# EAGLE board ConnectorPair (EAGLE 6.6.0)
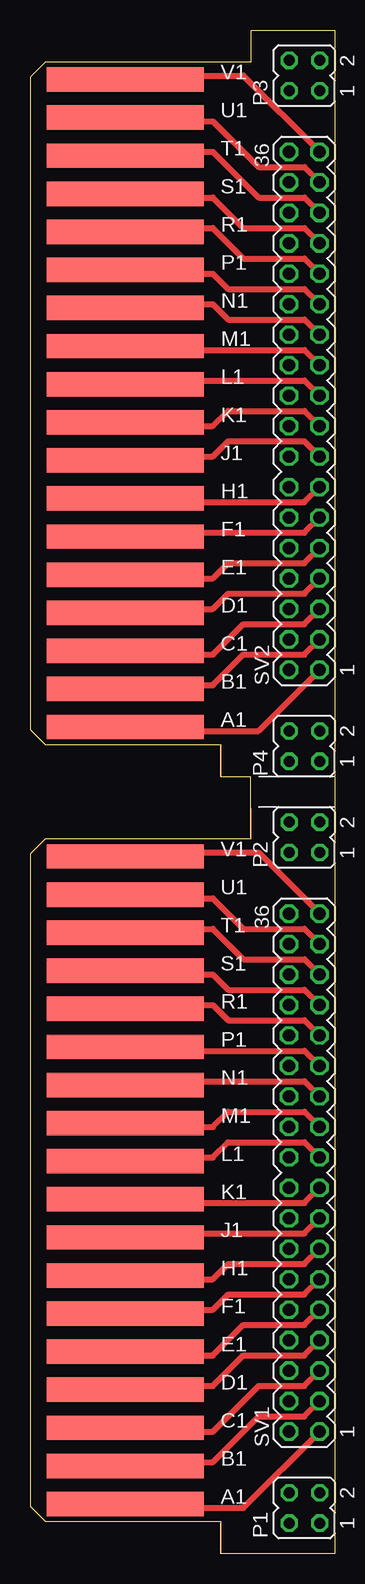
[diagram p0: board, top side]
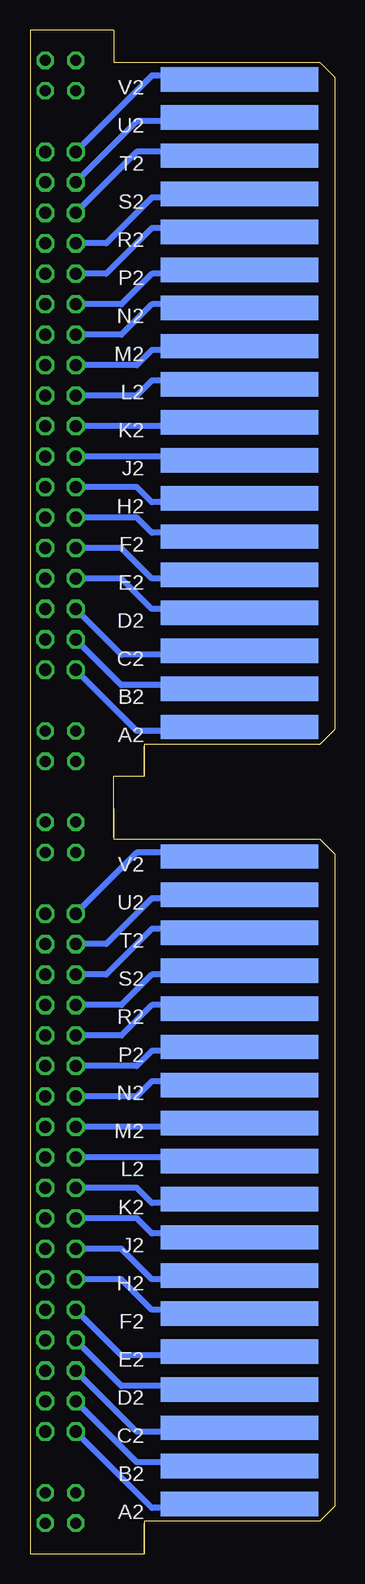
[diagram p1: board, bottom side, seen from below]

Size 25.4 x 127 mm. Coordinates in mm from the lower left corner, seen from the top.
Outline: 18.41,124.46 18.41,127 25.4,127 25.4,0 15.88,0 15.88,2.54
Outline: 15.88,67.31 15.88,64.77 18.41,64.77 18.41,59.69
Copper layers (1+16): Top 0.035mm / dielectric 1.5mm / Bottom 0.035mm
Design rules "16mils": minimum track width 16mil, minimum drill 32mil, track to track 15mil, track to pad 10mil, pad to pad 10mil, via to via 10mil, smd to smd 10mil, copper to edge 13mil, drill to drill 10mil, minimum pad ring 10mil, minimum via ring 8mil, stop-mask expansion 0mil, vias tented up to drill 0mil, thermal gap 10mil
Net classes: 0 default: width 0.508 mm

## Footprints (pad centres in the part's own frame; a part is rotated, then mirrored left to right if it is on the bottom)
JP2Q = drill 0.914 octagon: 1 -1.27,-1.27; 2 -1.27,1.27; 3 1.27,-1.27; 4 1.27,1.27
MA18-2 = drill 1.016 octagon: 1 -21.59,-1.27; 2 -21.59,1.27; 3 -19.05,-1.27; 4 -19.05,1.27; 5 -16.51,-1.27; 6 -16.51,1.27; 7 -13.97,-1.27; 8 -13.97,1.27; 9 -11.43,-1.27; 10 -11.43,1.27; 11 -8.89,-1.27; 12 -8.89,1.27; 13 -6.35,-1.27; 14 -6.35,1.27; 15 -3.81,-1.27; 16 -3.81,1.27; 17 -1.27,-1.27; 18 -1.27,1.27; 19 1.27,-1.27; 20 1.27,1.27; 21 3.81,-1.27; 22 3.81,1.27; 23 6.35,-1.27; 24 6.35,1.27; 25 8.89,-1.27; 26 8.89,1.27; 27 11.43,-1.27; 28 11.43,1.27; 29 13.97,-1.27; 30 13.97,1.27; 31 16.51,-1.27; 32 16.51,1.27; 33 19.05,-1.27; 34 19.05,1.27; 35 21.59,-1.27; 36 21.59,1.27
EDGE-CON2 = smd 13.106 x 2.032: A1 7.938,4.128; B1 7.938,7.303; C1 7.938,10.477; D1 7.938,13.652; E1 7.938,16.828; F1 7.938,20.003; H1 7.938,23.177; J1 7.938,26.352; K1 7.938,29.527; L1 7.938,32.703; M1 7.938,35.877; N1 7.938,39.053; P1 7.938,42.227; R1 7.938,45.403; S1 7.938,48.578; T1 7.938,51.752; U1 7.938,54.928; V1 7.938,58.102 | smd 13.106 x 2.032 bottom: A2 7.938,4.128; B2 7.938,7.303; C2 7.938,10.477; D2 7.938,13.652; E2 7.938,16.828; F2 7.938,20.003; H2 7.938,23.177; J2 7.938,26.352; K2 7.938,29.527; L2 7.938,32.703; M2 7.938,35.877; N2 7.938,39.053; P2 7.938,42.227; R2 7.938,45.403; S2 7.938,48.578; T2 7.938,51.752; U2 7.938,54.928; V2 7.938,58.102

## Placement (x,y rotation side)
P1  [JP2Q]  22.86,3.81 90 top
P2  [JP2Q]  22.86,59.69 90 top
P3  [JP2Q]  22.86,123.19 90 top
P4  [JP2Q]  22.86,67.31 90 top
SV1  [MA18-2]  22.86,31.75 90 top
SV2  [MA18-2]  22.86,95.25 90 top
U$1  [EDGE-CON2]  0,0 0 top
U$2  [EDGE-CON2]  0,64.77 0 top

## Library data of the parts
P1-P4 U$1 U$2 = dec-con
SV1 SV2 = con-lstb

## Nets
N$1: SV1.36 U$1.V2
N$2: SV1.34 U$1.U2
N$3: SV1.32 U$1.T2
N$4: SV1.30 U$1.S2
N$5: SV1.28 U$1.R2
N$6: SV1.26 U$1.P2
N$7: SV1.24 U$1.N2
N$8: SV1.22 U$1.M2
N$9: SV1.20 U$1.L2
N$10: SV1.18 U$1.K2
N$11: SV1.16 U$1.J2
N$12: SV1.14 U$1.H2
N$13: SV1.12 U$1.F2
N$14: SV1.10 U$1.E2
N$15: SV1.8 U$1.D2
N$16: SV1.6 U$1.C2
N$17: SV1.4 U$1.B2
N$18: SV1.2 U$1.A2
N$19: SV1.35 U$1.V1
N$20: SV1.33 U$1.U1
N$21: SV1.31 U$1.T1
N$22: SV1.29 U$1.S1
N$23: SV1.27 U$1.R1
N$24: SV1.25 U$1.P1
N$25: SV1.23 U$1.N1
N$26: SV1.21 U$1.M1
N$27: SV1.19 U$1.L1
N$28: SV1.17 U$1.K1
N$29: SV1.15 U$1.J1
N$30: SV1.13 U$1.H1
N$31: SV1.11 U$1.F1
N$32: SV1.9 U$1.E1
N$33: SV1.7 U$1.D1
N$34: SV1.5 U$1.C1
N$35: SV1.3 U$1.B1
N$36: SV1.1 U$1.A1
N$37: SV2.36 U$2.V2
N$38: SV2.34 U$2.U2
N$39: SV2.32 U$2.T2
N$40: SV2.30 U$2.S2
N$41: SV2.28 U$2.R2
N$42: SV2.26 U$2.P2
N$43: SV2.24 U$2.N2
N$44: SV2.22 U$2.M2
N$45: SV2.20 U$2.L2
N$46: SV2.18 U$2.K2
N$47: SV2.16 U$2.J2
N$48: SV2.14 U$2.H2
N$49: SV2.12 U$2.F2
N$50: SV2.10 U$2.E2
N$51: SV2.8 U$2.D2
N$52: SV2.6 U$2.C2
N$53: SV2.4 U$2.B2
N$54: SV2.2 U$2.A2
N$55: SV2.35 U$2.V1
N$56: SV2.33 U$2.U1
N$57: SV2.31 U$2.T1
N$58: SV2.29 U$2.S1
N$59: SV2.27 U$2.R1
N$60: SV2.25 U$2.P1
N$61: SV2.23 U$2.N1
N$62: SV2.21 U$2.M1
N$63: SV2.19 U$2.L1
N$64: SV2.17 U$2.K1
N$65: SV2.15 U$2.J1
N$66: SV2.13 U$2.H1
N$67: SV2.11 U$2.F1
N$68: SV2.9 U$2.E1
N$69: SV2.7 U$2.D1
N$70: SV2.5 U$2.C1
N$71: SV2.3 U$2.B1
N$72: SV2.1 U$2.A1

## Tracks (layer width: path | path; a pad name or v marks a point on that pad's centre or on a via)
N$1
  Bottom 0.508: SV1.36 16.51,58.42 8.89,58.42 U$1.V2
N$2
  Bottom 0.508: SV1.34 19.05,50.8 15.24,54.61 8.89,54.61 U$1.U2
N$3
  Bottom 0.508: SV1.32 19.05,48.26 15.24,52.07 8.89,52.07 U$1.T2
N$4
  Bottom 0.508: SV1.30 17.78,45.72 15.24,48.26 8.89,48.26 U$1.S2
N$5
  Bottom 0.508: SV1.28 17.78,43.18 15.24,45.72 8.89,45.72 U$1.R2
N$6
  Bottom 0.508: SV1.26 16.51,40.64 15.24,41.91 8.89,41.91 U$1.P2
N$7
  Bottom 0.508: SV1.24 16.51,38.1 15.24,39.37 8.89,39.37 U$1.N2
N$8
  Bottom 0.508: SV1.22 8.89,35.56 U$1.M2
N$9
  Bottom 0.508: SV1.20 8.89,33.02 U$1.L2
N$10
  Bottom 0.508: SV1.18 16.51,30.48 15.24,29.21 8.89,29.21 U$1.K2
N$11
  Bottom 0.508: SV1.16 16.51,27.94 15.24,26.67 8.89,26.67 U$1.J2
N$12
  Bottom 0.508: SV1.14 17.78,25.4 15.24,22.86 8.89,22.86 U$1.H2
N$13
  Bottom 0.508: SV1.12 17.78,22.86 15.24,20.32 8.89,20.32 U$1.F2
N$14
  Bottom 0.508: SV1.10 17.78,16.51 8.89,16.51 U$1.E2
N$15
  Bottom 0.508: SV1.8 17.78,13.97 8.89,13.97 U$1.D2
N$16
  Bottom 0.508: SV1.6 16.51,10.16 8.89,10.16 U$1.C2
N$17
  Bottom 0.508: SV1.4 16.51,7.62 8.89,7.62 U$1.B2
N$18
  Bottom 0.508: SV1.2 15.24,3.81 8.89,3.81 U$1.A2
N$19
  Top 0.508: SV1.35 19.05,58.42 8.89,58.42 U$1.V1
N$20
  Top 0.508: SV1.33 22.86,52.07 17.78,52.07 15.24,54.61 8.89,54.61 U$1.U1
N$21
  Top 0.508: SV1.31 22.86,49.53 17.78,49.53 15.24,52.07 8.89,52.07 U$1.T1
N$22
  Top 0.508: SV1.29 22.86,46.99 16.51,46.99 15.24,48.26 8.89,48.26 U$1.S1
N$23
  Top 0.508: SV1.27 22.86,44.45 16.51,44.45 15.24,45.72 8.89,45.72 U$1.R1
N$24
  Top 0.508: SV1.25 22.86,41.91 8.89,41.91 U$1.P1
N$25
  Top 0.508: SV1.23 22.86,39.37 8.89,39.37 U$1.N1
N$26
  Top 0.508: SV1.21 22.86,36.83 16.51,36.83 15.24,35.56 8.89,35.56 U$1.M1
N$27
  Top 0.508: SV1.19 22.86,34.29 16.51,34.29 15.24,33.02 8.89,33.02 U$1.L1
N$28
  Top 0.508: SV1.17 22.86,29.21 8.89,29.21 U$1.K1
N$29
  Top 0.508: SV1.15 22.86,26.67 8.89,26.67 U$1.J1
N$30
  Top 0.508: SV1.13 22.86,24.13 16.51,24.13 15.24,22.86 8.89,22.86 U$1.H1
N$31
  Top 0.508: SV1.11 22.86,21.59 16.51,21.59 15.24,20.32 8.89,20.32 U$1.F1
N$32
  Top 0.508: SV1.9 22.86,19.05 17.78,19.05 15.24,16.51 8.89,16.51 U$1.E1
N$33
  Top 0.508: SV1.7 22.86,16.51 17.78,16.51 15.24,13.97 8.89,13.97 U$1.D1
N$34
  Top 0.508: SV1.5 22.86,13.97 19.05,13.97 15.24,10.16 8.89,10.16 U$1.C1
N$35
  Top 0.508: SV1.3 22.86,11.43 19.05,11.43 15.24,7.62 8.89,7.62 U$1.B1
N$36
  Top 0.508: SV1.1 17.78,3.81 8.89,3.81 U$1.A1
N$37
  Bottom 0.508: SV2.36 15.24,123.19 8.89,123.19 U$2.V2
N$38
  Bottom 0.508: SV2.34 16.51,119.38 8.89,119.38 U$2.U2
N$39
  Bottom 0.508: SV2.32 16.51,116.84 8.89,116.84 U$2.T2
N$40
  Bottom 0.508: SV2.30 19.05,109.22 15.24,113.03 8.89,113.03 U$2.S2
N$41
  Bottom 0.508: SV2.28 19.05,106.68 15.24,110.49 8.89,110.49 U$2.R2
N$42
  Bottom 0.508: SV2.26 17.78,104.14 15.24,106.68 8.89,106.68 U$2.P2
N$43
  Bottom 0.508: SV2.24 17.78,101.6 15.24,104.14 8.89,104.14 U$2.N2
N$44
  Bottom 0.508: SV2.22 16.51,99.06 15.24,100.33 8.89,100.33 U$2.M2
N$45
  Bottom 0.508: SV2.20 16.51,96.52 15.24,97.79 8.89,97.79 U$2.L2
N$46
  Bottom 0.508: SV2.18 8.89,93.98 U$2.K2
N$47
  Bottom 0.508: SV2.16 8.89,91.44 U$2.J2
N$48
  Bottom 0.508: SV2.14 16.51,88.9 15.24,87.63 8.89,87.63 U$2.H2
N$49
  Bottom 0.508: SV2.12 16.51,86.36 15.24,85.09 8.89,85.09 U$2.F2
N$50
  Bottom 0.508: SV2.10 17.78,83.82 15.24,81.28 8.89,81.28 U$2.E2
N$51
  Bottom 0.508: SV2.8 17.78,81.28 15.24,78.74 8.89,78.74 U$2.D2
N$52
  Bottom 0.508: SV2.6 17.78,74.93 8.89,74.93 U$2.C2
N$53
  Bottom 0.508: SV2.4 17.78,72.39 8.89,72.39 U$2.B2
N$54
  Bottom 0.508: SV2.2 16.51,68.58 8.89,68.58 U$2.A2
N$55
  Top 0.508: SV2.35 17.78,123.19 8.89,123.19 U$2.V1
N$56
  Top 0.508: SV2.33 22.86,115.57 19.05,115.57 15.24,119.38 8.89,119.38 U$2.U1
N$57
  Top 0.508: SV2.31 22.86,113.03 19.05,113.03 15.24,116.84 8.89,116.84 U$2.T1
N$58
  Top 0.508: SV2.29 22.86,110.49 17.78,110.49 15.24,113.03 8.89,113.03 U$2.S1
N$59
  Top 0.508: SV2.27 22.86,107.95 17.78,107.95 15.24,110.49 8.89,110.49 U$2.R1
N$60
  Top 0.508: SV2.25 22.86,105.41 16.51,105.41 15.24,106.68 8.89,106.68 U$2.P1
N$61
  Top 0.508: SV2.23 22.86,102.87 16.51,102.87 15.24,104.14 8.89,104.14 U$2.N1
N$62
  Top 0.508: SV2.21 22.86,100.33 8.89,100.33 U$2.M1
N$63
  Top 0.508: SV2.19 22.86,97.79 8.89,97.79 U$2.L1
N$64
  Top 0.508: SV2.17 22.86,95.25 16.51,95.25 15.24,93.98 8.89,93.98 U$2.K1
N$65
  Top 0.508: SV2.15 22.86,92.71 16.51,92.71 15.24,91.44 8.89,91.44 U$2.J1
N$66
  Top 0.508: SV2.13 22.86,87.63 8.89,87.63 U$2.H1
N$67
  Top 0.508: SV2.11 22.86,85.09 8.89,85.09 U$2.F1
N$68
  Top 0.508: SV2.9 22.86,82.55 16.51,82.55 15.24,81.28 8.89,81.28 U$2.E1
N$69
  Top 0.508: SV2.7 22.86,80.01 16.51,80.01 15.24,78.74 8.89,78.74 U$2.D1
N$70
  Top 0.508: SV2.5 22.86,77.47 17.78,77.47 15.24,74.93 8.89,74.93 U$2.C1
N$71
  Top 0.508: SV2.3 22.86,74.93 17.78,74.93 15.24,72.39 8.89,72.39 U$2.B1
N$72
  Top 0.508: SV2.1 19.05,68.58 8.89,68.58 U$2.A1